# Altium PCB board.PcbDoc
Units mm, origin at the board's own origin, x right, y up, seen from the top; angles counter-clockwise.
Board outline 115 x 95 mm, 2 copper layers (Top Layer, Bottom Layer); 24 components, 27 nets, 145 pads, 40 vias.
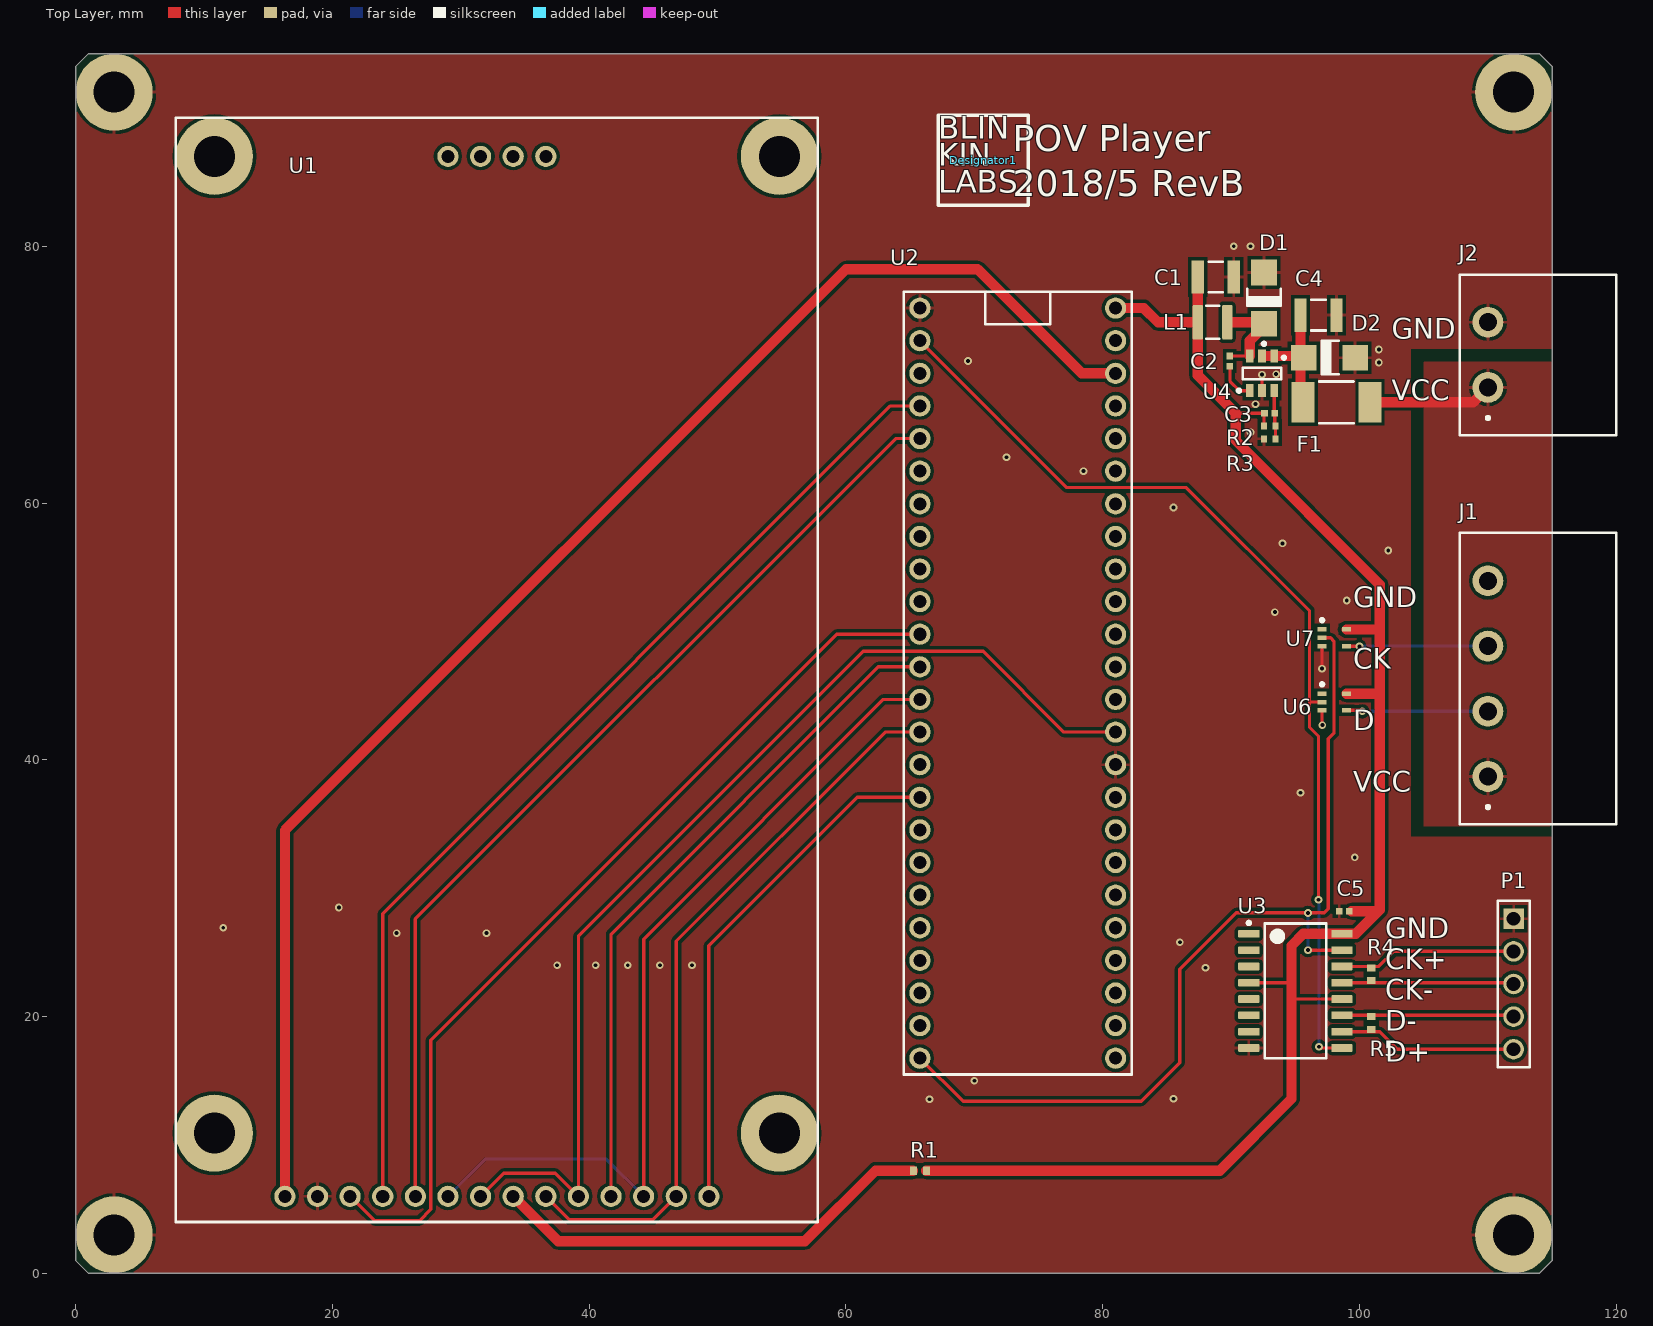
[diagram p0: Top Layer view]
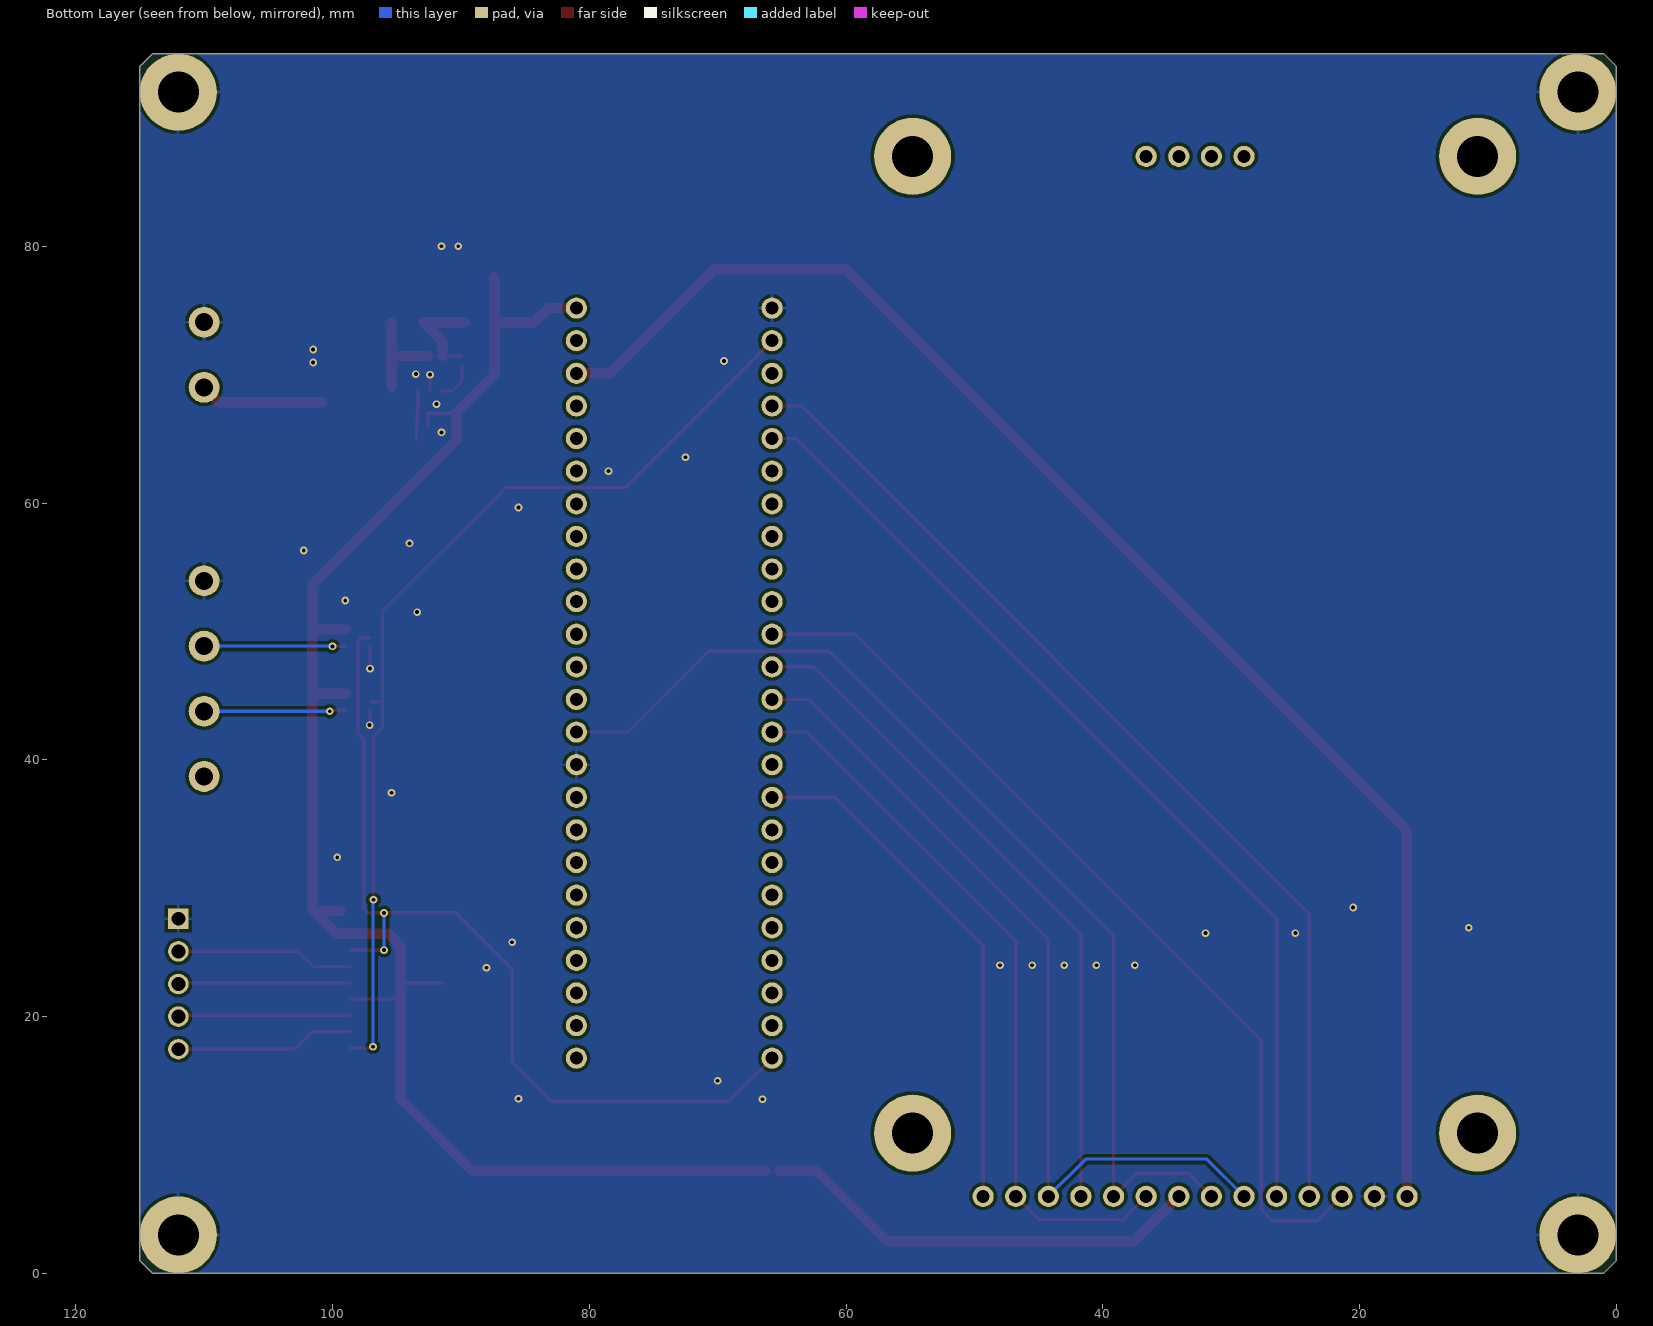
[diagram p1: Bottom Layer view, seen from below]

## Layer stack, top to bottom
Top Solder: solder mask 0.0102, Solder Resist, Dk 3.5
Top Layer: signal copper 0.0356
Dielectric 1: dielectric 0.32, FR-4, Dk 4.8
Bottom Layer: signal copper 0.0356
Bottom Solder: solder mask 0.0102, Solder Resist, Dk 3.5

## Board outline
1,0 0,1 0,94 1,95 114,95 115,94 115,1 114,0

## Design rules (kind name [scope] priority, off if disabled: settings)
Clearance [All] p1: gap=0.254 ignorepadtopadclearanceinfootprint=FALSE except(0: Arc-Hole Track-Hole SMDPad-Hole THPad-Hole Via-Hole Fill-Hole Poly-Hole Region-Hole Text-Hole)
PolygonConnect [All] p1: thpad.connectstyle=Relief thpad.reliefconductorwidth=0.254 thpad.reliefentries=4 thpad.polygonreliefangle="90 Angle" thpad.airgapwidth=0.254 smdpad.connectstyle=Relief smdpad.reliefconductorwidth=0.254 smdpad.reliefentries=4 smdpad.polygonreliefangle="90 Angle" smdpad.airgapwidth=0.254 via.connectstyle=Direct via.reliefconductorwidth=0.254 via.reliefentries=4 via.polygonreliefangle="90 Angle" via.airgapwidth=0.254
RoomDefinition board [InComponentClass('board')] p1: confinementstyle=ConfineIn formatcopy=TRUE lockcomponents=FALSE outline -8.5,-25.5 129.5,-25.5 129.5,112.5 -8.5,112.5
RoutingVias [All] p1: holewidth=0.711 width=1.27 viastyle="Through Hole" minholewidth=0.3 minwidth=0.6 maxholewidth=0.711 maxwidth=1.27
SolderMaskExpansion SolderMaskExpansion_Via [isvia] p1: expansion=-99
SolderMaskExpansion [All] p2: expansion=0.102
Width [All] p1: maxlimit=3 minlimit=0.254 preferedwidth=0.8
30 further rules are at their usual default settings.

## Components (designator, comment, footprint, x,y, rotation, side; value= is the part's Value field where it differs from the comment)
C1 "CAP 47uF 16V 1210(3225)" CAPC1210(3225)280_L 88.799,77.6 r180 top value=47uF
C2 "CAP 100nF 25V 0402(1005)" CAPC0402(1005)60_L 89.899,71.05 r90 top value=100nF
C3 "CAP 33pF 25V 0402(1005)" CAPC0402(1005)60_L 93,67 r180 top value=33pF
C4 "CAP 47uF 16V 1210(3225)" CAPC1210(3225)280_L 96.8,74.636 r180 top value=47uF
C5 "CAP 100nF 10V 0402(1005)" CAPC0402(1005)60_L 98.808,28.2 r0 top value=100nF
D1 "MURA110T3G" ONSC-SMA-2-403D-02_V 92.549,75.95 r90 top
D2 "MURA110T3G" ONSC-SMA-2-403D-02_V 97.653,71.323 r0 top
Designator1 "Comment" BLINKINLABS_LOGO 70.7,86.7 r0 top
F1 "1812L050/30PR" LFUS-1812L05030PR_V 98.2,67.842 r180 top
J1 "1757268" 1757268 114,46.32 r0 top
J2 "Power In" 1757242 110,71.54 r0 top
L1 "SWPA3010S100MT" SWPA3010S 88.549,74.08 r180 top
P1 "PHT-105-02-L-S" SMTC-PHT-105-02-X-S 112,27.62 r270 top
R1 "47R 5% 0402(1005)" RESC0402(1005)_N 65.76,8 r180 top value="47.00 Ohm"
R2 "127K 1% 0402(1005)" RESC0402(1005)_L 93,66 r180 top value="127000.00 Ohm"
R3 "23K7 1% 0402(1005)" RESC0402(1005)_L 93,65 r0 top value="23700.00 Ohm"
R4 "120R 5% 0402(1005)" RESC0402(1005)_N 100.9,23.3 r90 top value="120.00 Ohm"
R5 "120R 5% 0402(1005)" RESC0402(1005)_N 100.9,19.5 r270 top value="120.00 Ohm"
U1 "2.4\" SPI LCD ILI9341" "2.4\" SPI LCD ILI9341" 7.81,4 r0 top
U2 "TEENSY_3.6" TEENSY3.6-THRU_HOLE 65.76,75.18 r0 top
U3 "SN65C1168ENS" NS0016A_N 95,22 r0 top
U4 "BL9352A" SOT95P280X125-6N 92.399,70.1 r90 top
U6 "74LVC1G17GW" NXP-SOT353-1_L 98.029,44.5 r0 top
U7 "74LVC1G17GW" NXP-SOT353-1_L 98.029,49.5 r0 top

## Footprints (in the part's own frame and the unit in brackets; to place one, negate y for a bottom-side part, rotate by r counter-clockwise, add the part's x,y. Pads: shape width x height; smd on the part's side, far side on the other; paste and mask are expansions set on the pad)
"2.4\" SPI LCD ILI9341" [mm] "Generic 2.4 inch SPI LCD TFT serial module 240x320 with touch ILI9341"
  rrect100% 1.651x1.651 hole 1.016 paste+0: 1(8.49,2) 2(11.03,2) 3(13.57,2) 4(16.11,2) 5(18.65,2) 6(21.19,2) 7(23.73,2) 8(26.27,2) 9(28.81,2) 10(31.35,2) 11(33.89,2) 12(36.43,2) 13(38.97,2) 14(41.51,2) 15(21.19,83) 16(23.73,83) 17(26.27,83) 18(28.81,83)
  round 6 hole 3.2 unplated paste+0: M1(3,6.92) M2(3,83) M3(47,83) M4(47,6.92)
  silkscreen extent 0,0 50,86
1757242 [mm] "TERM BLOCK HDR 2POS 90DEG 5.08MM"
  round 2.4 hole 1.4: 1(0,-2.54) 2(0,2.54)
  silkscreen extent -2.2,-6.27 10,6.24, body extent -2,-6.07 10,6.09, height 8.6
1757268 [mm] "TERM BLOCK HDR 4POS 90DEG 5.08MM"
  round 2.4 hole 1.4: 1(-4,-7.62) 2(-4,-2.54) 3(-4,2.54) 4(-4,7.62)
  silkscreen extent -6.2,-11.35 6,11.35, body extent -6,-11.16 6,11.16, height 8.6
BLINKINLABS_LOGO [mm] "Square blinkinlabs logo"
  silkscreen extent -3.51,-3.51 3.5,3.5
CAPC0402(1005)60_L [mm] "Chip Capacitor, Body 1.0x0.5mm, Height 0.6mm, IPC High Density"
  rect 0.52x0.52 smd: 1(-0.4,0) 2(0.4,0)
  body extent -0.55,-0.3 0.55,0.3, height 0.6
CAPC1210(3225)280_L [mm] "Chip Capacitor, Body 3.2x2.5mm, Height 2.8mm, IPC High Density"
  rect 0.95x2.6 smd: 1(-1.4,0) 2(1.4,0)
  silkscreen extent -0.55,-1.2 0.55,1.2, body extent -1.7,-1.4 1.7,1.4, height 2.8
LFUS-1812L05030PR_V [mm] "SMD, 2-Leads, Body 4.55x3.24mm"
  rect 1.78x3.15 smd: 1(-2.615,0) 2(2.615,0)
  silkscreen extent -1.33,-1.62 1.33,1.62, body extent -2.27,-1.62 2.27,1.62, height 1
NS0016A_N [mm] "SOIC,16-Leads,Body 10.5x5.6mm,Pitch 1.27mm,IPC Medium Density"
  rrect17% 1.65x0.6 smd: 1(-3.625,4.445) 2(-3.625,3.175) 3(-3.625,1.905) 4(-3.625,0.635) 5(-3.625,-0.635) 6(-3.625,-1.905) 7(-3.625,-3.175) 8(-3.625,-4.445) 9(3.625,-4.445) 10(3.625,-3.175) 11(3.625,-1.905) 12(3.625,-0.635) 13(3.625,0.635) 14(3.625,1.905) 15(3.625,3.175) 16(3.625,4.445)
  silkscreen extent -3.75,-5.25 2.4,5.42, body extent -2.8,-5.25 2.8,5.25, height 2
NXP-SOT353-1_L [mm] "TSSOP, 5-Leads, Body 2.25x1.35mm, Pitch 0.65mm, IPC High Density"
  rect 0.7x0.35 smd: 1(-0.95,0.65) 2(-0.95,0) 3(-0.95,-0.65) 4(0.95,-0.65) 5(0.95,0.65)
  silkscreen extent -1.07,1.25 -0.82,1.5, body extent -0.67,-1.12 0.67,1.13, height 1.1
ONSC-SMA-2-403D-02_V [mm] "Molded, 2-Leads, Body 4.57x2.92mm"
  rect 2x2 smd: 1(-2,0) 2(2,0)
  silkscreen extent -3.67,-1.3 0.74,1.3, body extent -2.16,-1.3 2.16,1.3, height 2.2
RESC0402(1005)_L [mm] "Chip Resistor, Body 1.0x0.5mm, IPC High Density"
  rect 0.45x0.55 smd: 1(-0.45,0) 2(0.45,0)
  body extent -0.52,-0.27 0.53,0.28, height 0.4
RESC0402(1005)_N [mm] "Chip Resistor, Body 1.0x0.5mm, IPC Medium Density"
  rect 0.55x0.65 smd: 1(-0.5,0) 2(0.5,0)
  body extent -0.52,-0.27 0.53,0.28, height 0.4
SMTC-PHT-105-02-X-S [mm] "Press Fit Socket Assembly, 1x5 Pins, Vertical, 2.54mm Pitch, Male"
  rect 1.6x1.6 hole 1.081: 1(0,0)
  round 1.6 hole 1.081: 2(2.54,0) 3(5.08,0) 4(7.62,0) 5(10.16,0)
  silkscreen extent -1.4,-1.24 11.56,1.24, body extent -1.27,-1.25 11.43,1.25, height 10.92
SOT95P280X125-6N [mm] "SOT23, 6-Leads, Body 2.92x2.80mm, Pitch 0.95mm, IPC Medium Density"
  rect 1x0.6 smd: 1(-1.35,0.95) 2(-1.35,0) 3(-1.35,-0.95) 4(1.35,-0.95) 5(1.35,0) 6(1.35,0.95)
  silkscreen extent -1.47,-1.5 0.45,1.92, body extent -1.48,-1.51 1.48,1.51, height 1.25
SWPA3010S [mm] "Wire Wound SMD Power Inductor 3.0×3.0×1.0"
  rrect25% 0.8x2.7 smd paste+0: 1(-1.15,0) 2(1.15,0)
  silkscreen extent -0.5,-1.3 0.5,1.3
TEENSY3.6-THRU_HOLE [mil]
  round 65 hole 40 paste+0: 1(0,0) 2(0,-100) 3(0,-200) 4(0,-300) 5(0,-400) 6(0,-500) 7(0,-600) 8(0,-700) 9(0,-800) 10(0,-900) 11(0,-1000) 12(0,-1100) 13(0,-1200) 14(0,-1300)
  rrect100% 65x65 hole 40 paste+0: 15(0,-1400) 16(0,-1500) 17(0,-1600) 18(0,-1700) 19(0,-1800) 20(0,-1900) 21(0,-2000) 22(0,-2100) 23(0,-2200) 24(0,-2300) 25(600,-2300) 26(600,-2200) 27(600,-2100) 28(600,-2000) 29(600,-1900) 30(600,-1800) 31(600,-1700) 32(600,-1600) 33(600,-1500) 34(600,-1400) 35(600,-1300) 36(600,-1200) 37(600,-1100) 38(600,-1000) 39(600,-900) 40(600,-800) 41(600,-700) 42(600,-600) 43(600,-500) 44(600,-400) 45(600,-300) 46(600,-200) 47(600,-100) 48(600,0)
  silkscreen extent -50,-2350 650,50

## Part data
C1 C4: library part CMP-1038-02296-1, "CAP 47uF 16V ±20% 1210 (3225 Metric) Thickness 2.8mm SMD", Case-EIA=1210, Case-Metric=3225, Rated Voltage="16 V", Tolerance=±20%, Max Thickness="2.8 mm", Technology=SMT
C2: library part CMP-1034-02073-1, "CAP 100nF 25V ±20% 0402 (1005 Metric) Thickness 0.6mm SMD", Case-EIA=0402, Case-Metric=1005, Rated Voltage="25 V", Tolerance=±20%, Max Thickness="0.6 mm", Technology=SMT
C3: library part CMP-1034-00998-1, "CAP 33pF 25V ±5% 0402 (1005 Metric) Thickness 0.6mm SMD", Case-EIA=0402, Case-Metric=1005, Rated Voltage="25 V", Tolerance=±5%, Max Thickness="0.6 mm", Technology=SMT
C5: library part CMP-1034-02065-1, "CAP 100nF 10V ±10% 0402 (1005 Metric) Thickness 0.6mm SMD", Case-EIA=0402, Case-Metric=1005, Rated Voltage="10 V", Tolerance=±10%, Max Thickness="0.6 mm", Technology=SMT
D1 D2: library part CMP-0902-00293-1, "Surface Mount Ultrafast Power Rectifier, 2-Pin SMA, Pb-Free, Tape and Reel", Manufacturer="On Semiconductor", ComponentLink1Description="Manufacturer URL", ComponentLink1URL=http://www.onsemi.com/, ComponentLink2Description=Datasheet, ComponentLink2URL=http://www.onsemi.cn/pub_link/Collateral/MURA105T3-D.PDF, ComponentLink3Description="Package Specification", ComponentLink3URL=http://www.onsemi.com/pub_link/Collateral/403D-02.PDF, DatasheetVersion="Rev. 5", IFSM Max (A)=50, Mounting Technology="Surface Mount", PackageDescription="2-Pin Small Molded Package, J-Bend Lead, Body 2.605 x 4.315 mm", PackageReference=SMA-2-403D-02, PackageVersion="Rev. G, 07/2012", Packing="Tape and Reel", PartNumber=MURA110T3G, RoHS=TRUE, Type=Ultrafast
F1: library part CMP-2000-05508-1, "PTC Resettable Fuse, 0.8 W, 30 V, -40 to 85 degC, 2-Pin SMD, RoHS, Tape and Reel", Current - Hold (Ih) (Max)=500mA, Current - Max=100A, Current - Trip (It)=1A, Manufacturer=Littelfuse-Inc., Package / Case=1812(4532Metric),Concave, Package Description="2-Pin Surface Mount Device, Body 4.55 x 3.24 mm", Package Reference=1812, Voltage - Max=30V, Category=CircuitProtection, Datasheet URL=http://www.littelfuse.com/~/media/electronics/datasheets/resettable_ptcs/littelfuse_ptc_1812l_datasheet.pdf.pdf, Datasheet Version=02/2016, Family=PTCResettableFuses, Manufacturer URL=http://www.littelfuse.com/, Mounting Technology=SurfaceMount, Packaging=Tape&Reel(TR), R Min/Max=0.150~1.000Ohm, Series=POLY-FUSE®,1812L, Time to Trip=0.15s
J1: "TERM BLOCK HDR 4POS 90DEG 5.08MM", Manufacturer="Phoenix Contact", ComponentLink2Description=Datasheet, ComponentLink2URL=1757268_06_en_00.pdf, PartNumber=1757268
J2: library part 1757242, "TERM BLOCK HDR 2POS 90DEG 5.08MM", Manufacturer="Phoenix Contact", PartNumber=1757268, ComponentLink2Description=Datasheet, ComponentLink2URL=1757268_06_en_00.pdf
L1: "Wire Wound SMD Power Inductors 3010 3.0×3.0×1.0 10uH, .75A"
P1: library part CMP-1024-00186-1, "Press Fit Header, Through-hole, Vertical, -55 to 125 degC, 2.54 mm Pitch, 5-Pin, Male, RoHS", Manufacturer=Samtec, Temperature Range="-55 to 125 degC", ComponentLink1Description="Manufacturer URL", ComponentLink1URL=http://www.samtec.com, ComponentLink2Description=Datasheet, ComponentLink2URL=http://www.samtec.com/documents/webfiles/pdf/pht.pdf, ComponentLink3Description="Package Specification", ComponentLink3URL=http://www.samtec.com/documents/webfiles/cpdf/PHT-1XX-XX-X-X-XXX-MKT.pdf, DatasheetVersion=F-214, Mounting Technology=Through-hole, Orientation=Vertical, PackageDescription=".100 Press Fit Socket Assembly", PackageReference=PHT-105-02-X-S, PackageVersion="J, 9/2009", PartNumber=PHT-105-02-L-S, Pitch="2.54 mm", RoHS=True
R1: library part CMP-1011-00042-1, "47R 0.063W 5% 0402 (1005 Metric)  SMD", Case-EIA=0402, Case-Metric=1005, Power="0.063 W", Tolerance="5 %", Technology=SMT
R2: library part CMP-1011-00747-1, "127K 0.063W 1% 0402 (1005 Metric)  SMD", Case-EIA=0402, Case-Metric=1005, Power="0.063 W", Tolerance="1 %", Technology=SMT
R3: library part CMP-1011-00663-1, "23K7 0.063W 1% 0402 (1005 Metric)  SMD", Case-EIA=0402, Case-Metric=1005, Power="0.063 W", Tolerance="1 %", Technology=SMT
R4 R5: library part CMP-1011-00052-1, "120R 0.063W 5% 0402 (1005 Metric)  SMD", Case-EIA=0402, Case-Metric=1005, Power="0.063 W", Tolerance="5 %", Technology=SMT
U1: "Generic 2.4 inch SPI LCD TFT serial module 240x320 with touch ILI9341"
U2: "Teensy 3.6"
U3: library part CMP-0310-00409-2, "Dual Differential Driver and Receiver with +/-15-kV IEC ESD Protection, 2 TX / 2 RX, 5V, -40 to 85 degC, 16-Pin SO (NS), Green (RoHS & no Sb/Br)", Drivers Per Package=2, Manufacturer="Texas Instruments", Rating=Catalog, Supply Voltage(s)(V)=5, # of TX/RX="2 TX / 2 RX", ComponentLink1Description=Datasheet, ComponentLink1URL=http://www.ti.com/general/docs/lit/getliterature.tsp?genericPartNumber=SN65C1168E&fileType=pdf, ComponentLink2Description="Package Specification", ComponentLink2URL=http://www.ti.com/litv/pdf/msop002a, DatasheetVersion=SLLS740A, Eco-Plan="Green (RoHS & no Sb/Br)", ESD(kV)=15, ICC(Max)(mA)=9, Mounting Technology="Surface Mount", PackageDescription="16-Pin Plastic Small Outline Package, 10.2 x 5.3 mm, Pitch 1.27 mm Pitch", PackageReference=NS0016A, PackageVersion="revC, Mar-2003", PartNumber=SN65C1168ENS, Receivers Per Package=2, SubFamily=RS-422
U4: "45V, 1.6MHz, 600mA Step-Down Converter"
U6 U7: library part CMP-2000-05689-1, "Single Schmitt Trigger Buffer, 1.65 to 5.5 V, -40 to 125 degC, 5-Pin TSSOP (SOT353-1), RoHS, Tape and Reel", Manufacturer="NXP Semiconductors", Maximum High Level Output Current=-32mA, Maximum Low Level Output Current=32mA, Maximum Operating Supply Voltage=5.5V, Maximum Operating Temperature=+125°C, Minimum Operating Supply Voltage=1.65V, Minimum Operating Temperature=-40°C, Package Description="5-Pin Thin Shrink Small Outline Package, Body 2.05 x 1.25 mm, Pitch 0.65 mm", Package Reference=SOT353-1, Package Type=TSSOP, Datasheet URL=http://www.nxp.com/documents/data_sheet/74LVC1G17.pdf?fasp=1&WT_TYPE=Data%20Sheets&WT_VENDOR=FREESCALE&WT_FILE_FORMAT=pdf&WT_ASSET=Documentation&fileExt=.pdf, Datasheet Version="Rev. 10, 06/2012", Dimensions=2.25x1.35x1mm, Height=1mm, Input Type=SchmittTrigger, Length=2.25mm, Logic Family=LVC, Logic Function=Buffer, Manufacturer URL=http://www.nxp.com/, Maximum Propagation Delay Time @ Maximum CL=14ns, Mounting Technology=SurfaceMount, Mounting Type=SurfaceMount, Number of Channels=1, Output Type=SingleEnded, Package URL=http://www.nxp.com/documents/outline_drawing/SOT353-1.pdf, PartId=1, Pin Count=5, Polarity=Non-Inverting, Schmitt Trigger Input=Yes, Width=1.35mm

## Free pads (board coordinates)
  round 6 hole 3.2 paste+0: M5(112,92) M6(112,3) M7(3,3) M8(3,92)

## Via types
v1: diameter 0.6, hole 0.3, Top Layer to Bottom Layer, 40 vias

## Nets (pads, with @x,y where several pads share a name; then routed paths per layer and width w, separated by ;. In a path a pad name is that pad's centre, name@x,y a point inside that pad or via, vN(x,y) a via of type N, cw(c..) or ccw(c..) an arc to the next point about the centre after c; other vN are vias at no path point)
3.3V: U1.1 U2.46 | length 114.7
  Top Layer w0.8: U1.1 16.3,34.5 60,78.2 70.25,78.2 78.35,70.1 U2.46
5V: C1.2 C3.2 C5.2 L1.2 R1.1 R2.2 U2.48 U3.4 U3.12 U3.16 U6.5 U7.5 | length 130.5
  Top Layer w0.254: 90.348,67 C3.2@92.549,67 ; U3.4 94.7,22.635 ; R2.2 92.55,66.95 C3.2 ; 94.735,21.365 U3.12
  Top Layer w0.8: R1.1 89.1,8 94.7,13.6 94.7,21.4 ; U2.48 83.199,75.18 84.299,74.08 L1.2 ; C1.2 L1.2 ; 94.735,21.365 94.7,21.4 ; U6.5 101.575,45.15 ; U7.5 101.575,50.15 ; C5.2@99.4,28.2 101.454,28.2 ; L1.2 87.399,69.949 90.348,67 90.348,64.871 101.575,53.644 101.575,50.15 ; 94.7,21.4 94.7,22.635 94.7,25.531 95.614,26.445 U3.16 99.699,26.445 101.454,28.2 ; 101.454,28.2 101.575,28.321 101.575,45.15 ; 101.575,45.15 101.575,50.15
CLK0_OUT: J1.3 U7.4 | length 11.1
  Top Layer w0.254: U7.4 98.991,48.837 v1(100,48.837) ; J1.3@109.99,48.85 J1.3
  Bottom Layer w0.254: v1(100,48.837) 100.023,48.86 J1.3
CLK0_OUT_+: P1.2 R4.2 U3.14 | length 13.9
  Top Layer w0.254: U3.14 101.505,23.905 102.68,25.08 P1.2
CLK0_OUT_-: P1.3 R4.1 U3.13 | length 13.4
  Top Layer w0.254: U3.13 111.905,22.635 P1.3
DATA0_OUT: J1.2 U6.4 | length 11.1
  Top Layer w0.254: U6.4 100.136,43.85 v1(100.206,43.78) ; J1.2@109.93,43.85 J1.2
  Bottom Layer w0.254: v1(100.206,43.78) J1.2
DATA0_OUT_+: P1.5 R5.2 U3.10 | length 13.9
  Top Layer w0.254: U3.10 101.575,18.825 102.94,17.46 P1.5
DATA0_OUT_-: P1.4 R5.1 U3.11 | length 13.4
  Top Layer w0.254: U3.11 111.905,20.095 P1.4
GND: C1.1 C4.1 C5.1 D1.2 D2.2 J1.4 J2.2 P1.1 pad.M5 pad.M6 pad.M7 pad.M8 R3.1 U1.2 U2.1 U2.34 U3.8 U4.2 U6.3 U7.3 | length 4.2
  Top Layer w0.254: U4.2 v1(92.399,70) ; U6.3 97.079,42.722 v1(97.1,42.7) ; v1(97.079,47.1) U7.3
  other v1: 66.5,13.561 85.5,13.6 70,15 88,23.8 37.5,24 40.5,24 43,24 45.5,24 48,24 86,25.785 25,26.5 32,26.5 11.5,26.92 20.5,28.5 99.619,32.4 95.399,37.43 93.4,51.5 99,52.4 102.235,56.3 94,56.856 85.5,59.658 78.5,62.48 72.5,63.569 91.5,65.5 91.9,67.7 93.499,70.037 101.5,70.936 69.5,71.062 101.5,71.964 90.199,80 91.5,80
I2C_SCL0: U2.41
I2C_SDA0: U2.40
NetC2_1: C2.1 U4.1 | length 3
  Top Layer w0.254: C2.1 89.899,69.5 90.649,68.75 U4.1
NetC2_2: C2.2 D1.1 L1.1 U4.6 | length 8
  Top Layer w0.254: C2.2 U4.6@91.445,71.45
  Top Layer w0.8: L1.1 92.896,74.08 91.445,72.63 U4.6@91.445,71.45
NetC3_1: C3.1 R2.1 R3.2 U4.3 | length 3.8
  Top Layer w0.254: C3.1@93.349,67 U4.3 ; C3.1 93.4,66.05 R2.1 R3.2
NetC4_2: C4.2 D2.1 F1.2 U4.4 U4.5 | length 7.8
  Top Layer w0.8: U4.5@92.549,71.45 U4.4 D2.1@95.399,71.45 ; F1.2@95.399,69 D2.1@95.399,71.45 ; C4.2@95.399,74 D2.1@95.399,71.45
NetR1_2: R1.2 U1.8 | length 34.9
  Top Layer w0.8: U1.8 37.58,2.5 56.8,2.5 62.3,8 R1.2@65.206,8
SPI_CS0_A: U1.11 U2.12 | length 53.1
  Top Layer w0.254: U1.11 41.7,26.431 62.509,47.24 U2.12
SPI_CS0_B: U1.3 U2.11 | length 71.8
  Top Layer w0.254: U1.3 23.28,4.1 26.787,4.1 27.667,4.979 27.667,18.167 59.28,49.78 U2.11
SPI_MISO0: U1.9 U1.13 U2.14 | length 57.3
  Top Layer w0.254: U1.9 38.42,4.2 44.98,4.2 U1.13 46.78,25.888 63.052,42.16 U2.14
SPI_MOSI0: U1.6 U1.12 U2.13 | length 66.9
  Top Layer w0.254: U1.12 44.24,26.038 62.902,44.7 U2.13
  Bottom Layer w0.254: U1.6 31.9,8.9 41.34,8.9 U1.12
SPI_MOSI1: U2.2 U3.9 U6.2 | length 76.2
  Top Layer w0.254: U2.2 77.2,61.2 86.5,61.2 96.1,51.6 96.1,44.5 ; v1(96.8,29.1) 96.8,41.827 96.1,42.526 96.1,44.5 ; v1(96.845,17.655) 96.845,17.555 U3.9 ; U6.2 96.1,44.5
  Bottom Layer w0.254: v1(96.8,29.1) 96.845,29.055 v1(96.845,17.655)
SPI_SCK0: U1.7 U1.10 U2.35 | length 83
  Top Layer w0.254: U1.7 33.34,7.8 37.36,7.8 U1.10 39.16,26.26 61.347,48.447 70.682,48.447 76.969,42.16 U2.35
SPI_SCK1: U2.24 U3.15 U7.2 | length 71.3
  Top Layer w0.254: U2.24 69.12,13.4 83,13.4 86,16.4 86,23.696 90.394,28.09 v1@95.99,28.09 ; v1(95.975,25.175) U3.15 ; v1(95.975,28.075) v1@95.99,28.09 ; v1@96,28.1 v1@95.99,28.09 ; U7.2 97.74,49.5 98,49.24 98,42.078 97.559,41.637 97.559,28.384 97.265,28.09 v1@95.99,28.09
  Bottom Layer w0.254: v1(95.975,25.175) v1(95.975,28.075)
TFT_DC: U1.5 U2.5 | length 76.4
  Top Layer w0.254: U1.5 26.46,27.61 63.87,65.02 U2.5
TFT_RESET: U1.4 U2.4 | length 80.2
  Top Layer w0.254: U1.4 23.92,28.02 63.46,67.56 U2.4
TOUCH_IRQ: U1.14 U2.16 | length 40.7
  Top Layer w0.254: U1.14 49.32,25.52 60.88,37.08 U2.16
VIN: F1.1 J1.1 J2.1 | length 9.7
  Top Layer w0.8: F1.1 108.842,67.842 J2.1
pads on no net: U1.15 U1.16 U1.17 U1.18 U1.M1 U1.M2 U1.M3 U1.M4 U2.3 U2.6 U2.7 U2.8 U2.9 U2.10 U2.15 U2.17 U2.18 U2.19 U2.20 U2.21 U2.22 U2.23 U2.25 U2.26 U2.27 U2.28 U2.29 U2.30 U2.31 U2.32 U2.33 U2.36 U2.37 U2.38 U2.39 U2.42 U2.43 U2.44 U2.45 U2.47 U3.1 U3.2 U3.3 U3.5 U3.6 U3.7 U6.1 U7.1

## Polygon pours and split planes (outlines as drawn)
GND on Bottom Layer "NONET_L-01_P-001" (solid, pour order 0): 0,95 115,95 115,0 0,0
GND on Top Layer "NONET_L-01_P-001" (solid, pour order 2): 0,95 115,95 115,72 104,72 104,34 115,34 115,0 0,0
VIN on Top Layer "NONET_L-01_P-001" (solid, pour order 4): 105,70.976 105.024,71 115,71 115,35 114.822,34.822 105,34.822

## Silkscreen, mask and mechanical layers (free items; w line width, h text height)
Top Overlay:
  text "POV Player / 2018/5 RevB" at 73,83.189 h3.5
  text "GND /  / VCC" at 102.5,68 h1.6
  text "GND /  / CK /  / D /  / VCC" at 99.5,37.5 h1.6
  text "GND / CK+ / CK- / D- / D+" at 102,16.5 h1.6
Mechanical 1:
  the board outline again, w0.2

## Text inside footprints (layer, text, board x,y; h text height)
Designator1: Top Overlay "LABS" at 67.2,83.6 h3; Top Overlay "BLIN" at 67.2,87.8 h3; Top Overlay "KIN" at 67.2,85.7 h3